# Altium PCB CP_PCB.PcbDoc
Units mil, origin at the board's own origin, x right, y up, seen from the top; angles counter-clockwise.
Board outline 1989.68 x 1920.98 mil, 2 copper layers (Top Layer, Bottom Layer); 47 components, 38 nets, 191 pads, 35 vias.
Unrouted connection lines stored in the file: 15.
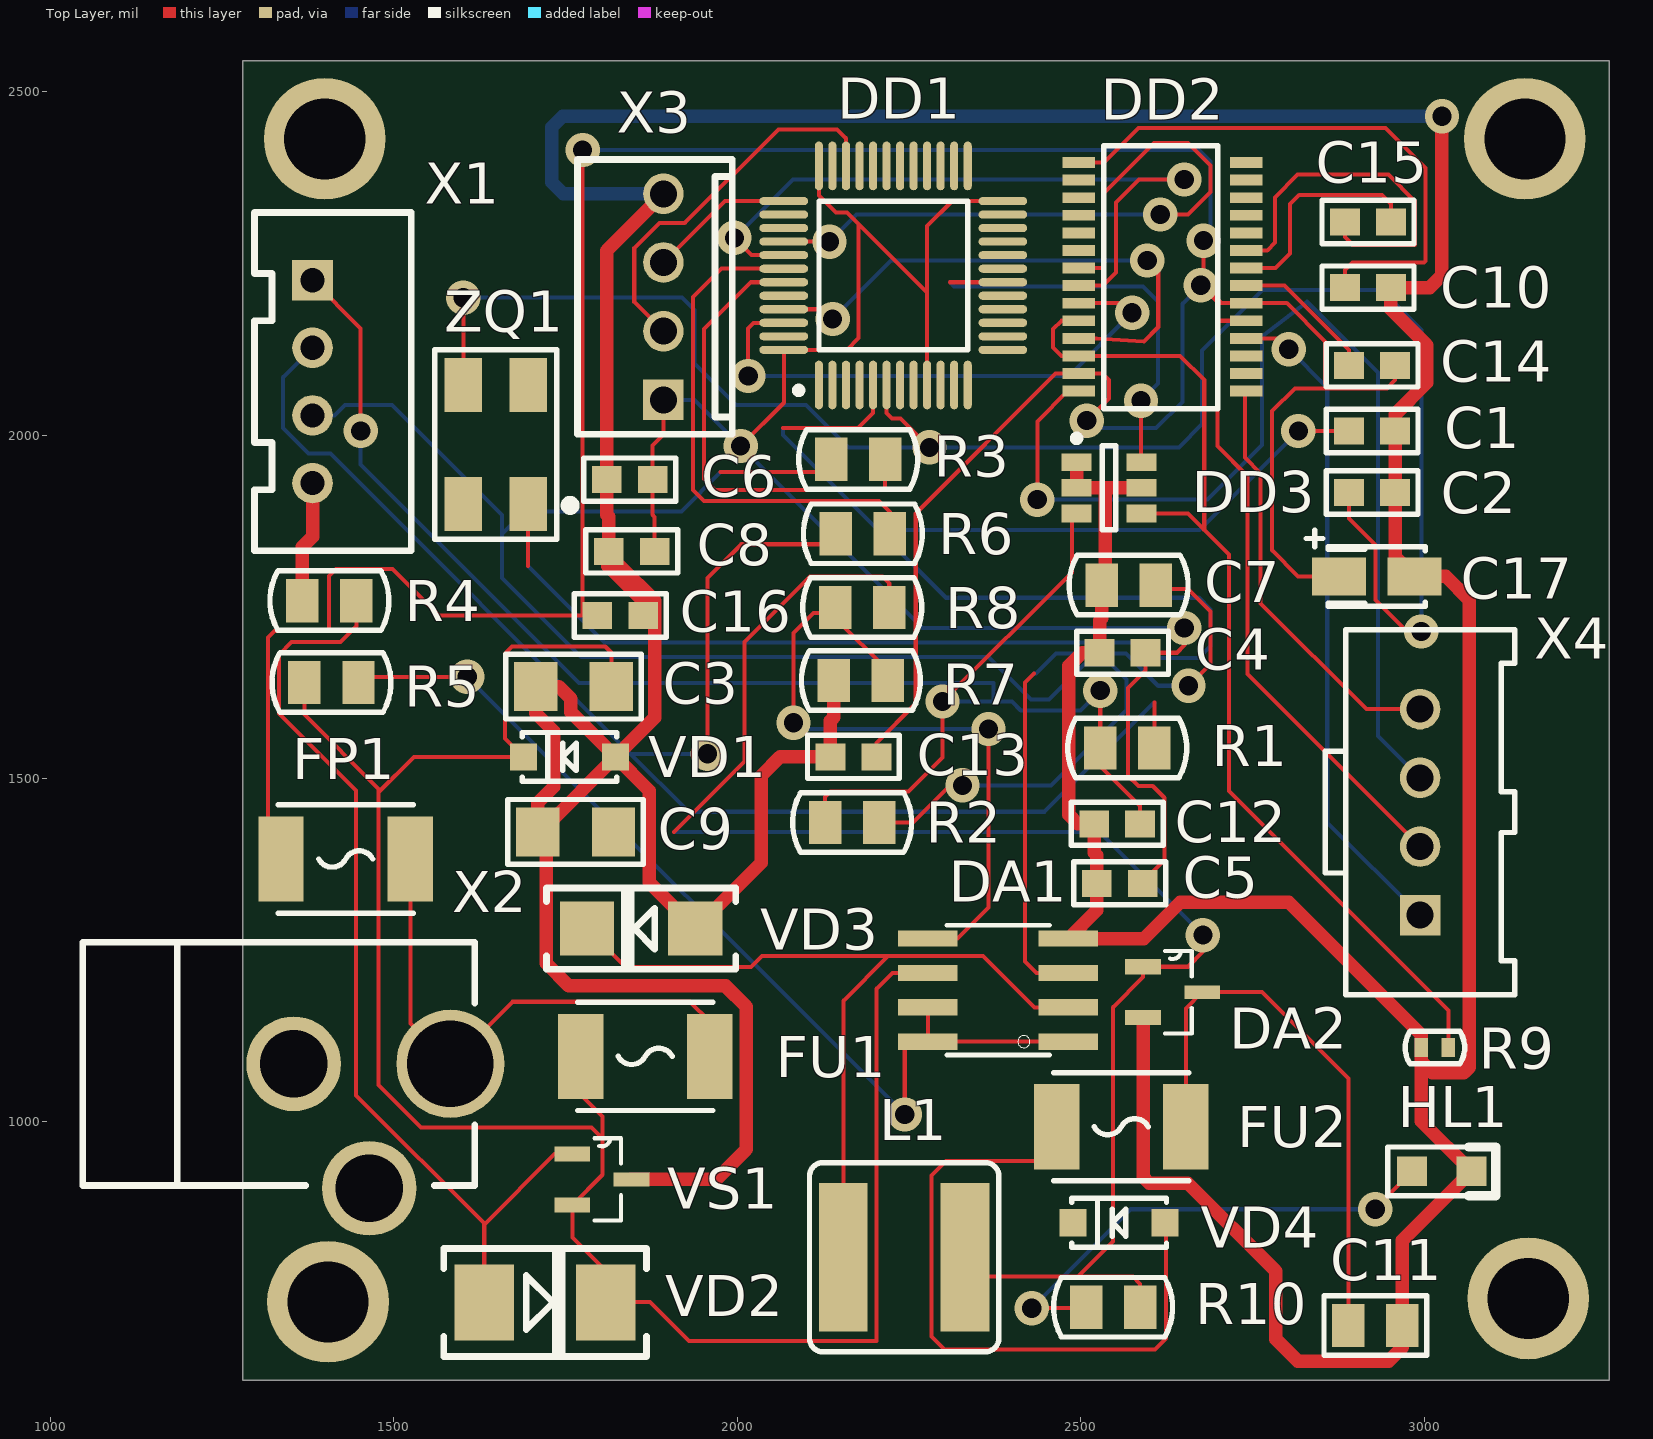
[diagram p0: Top Layer view]
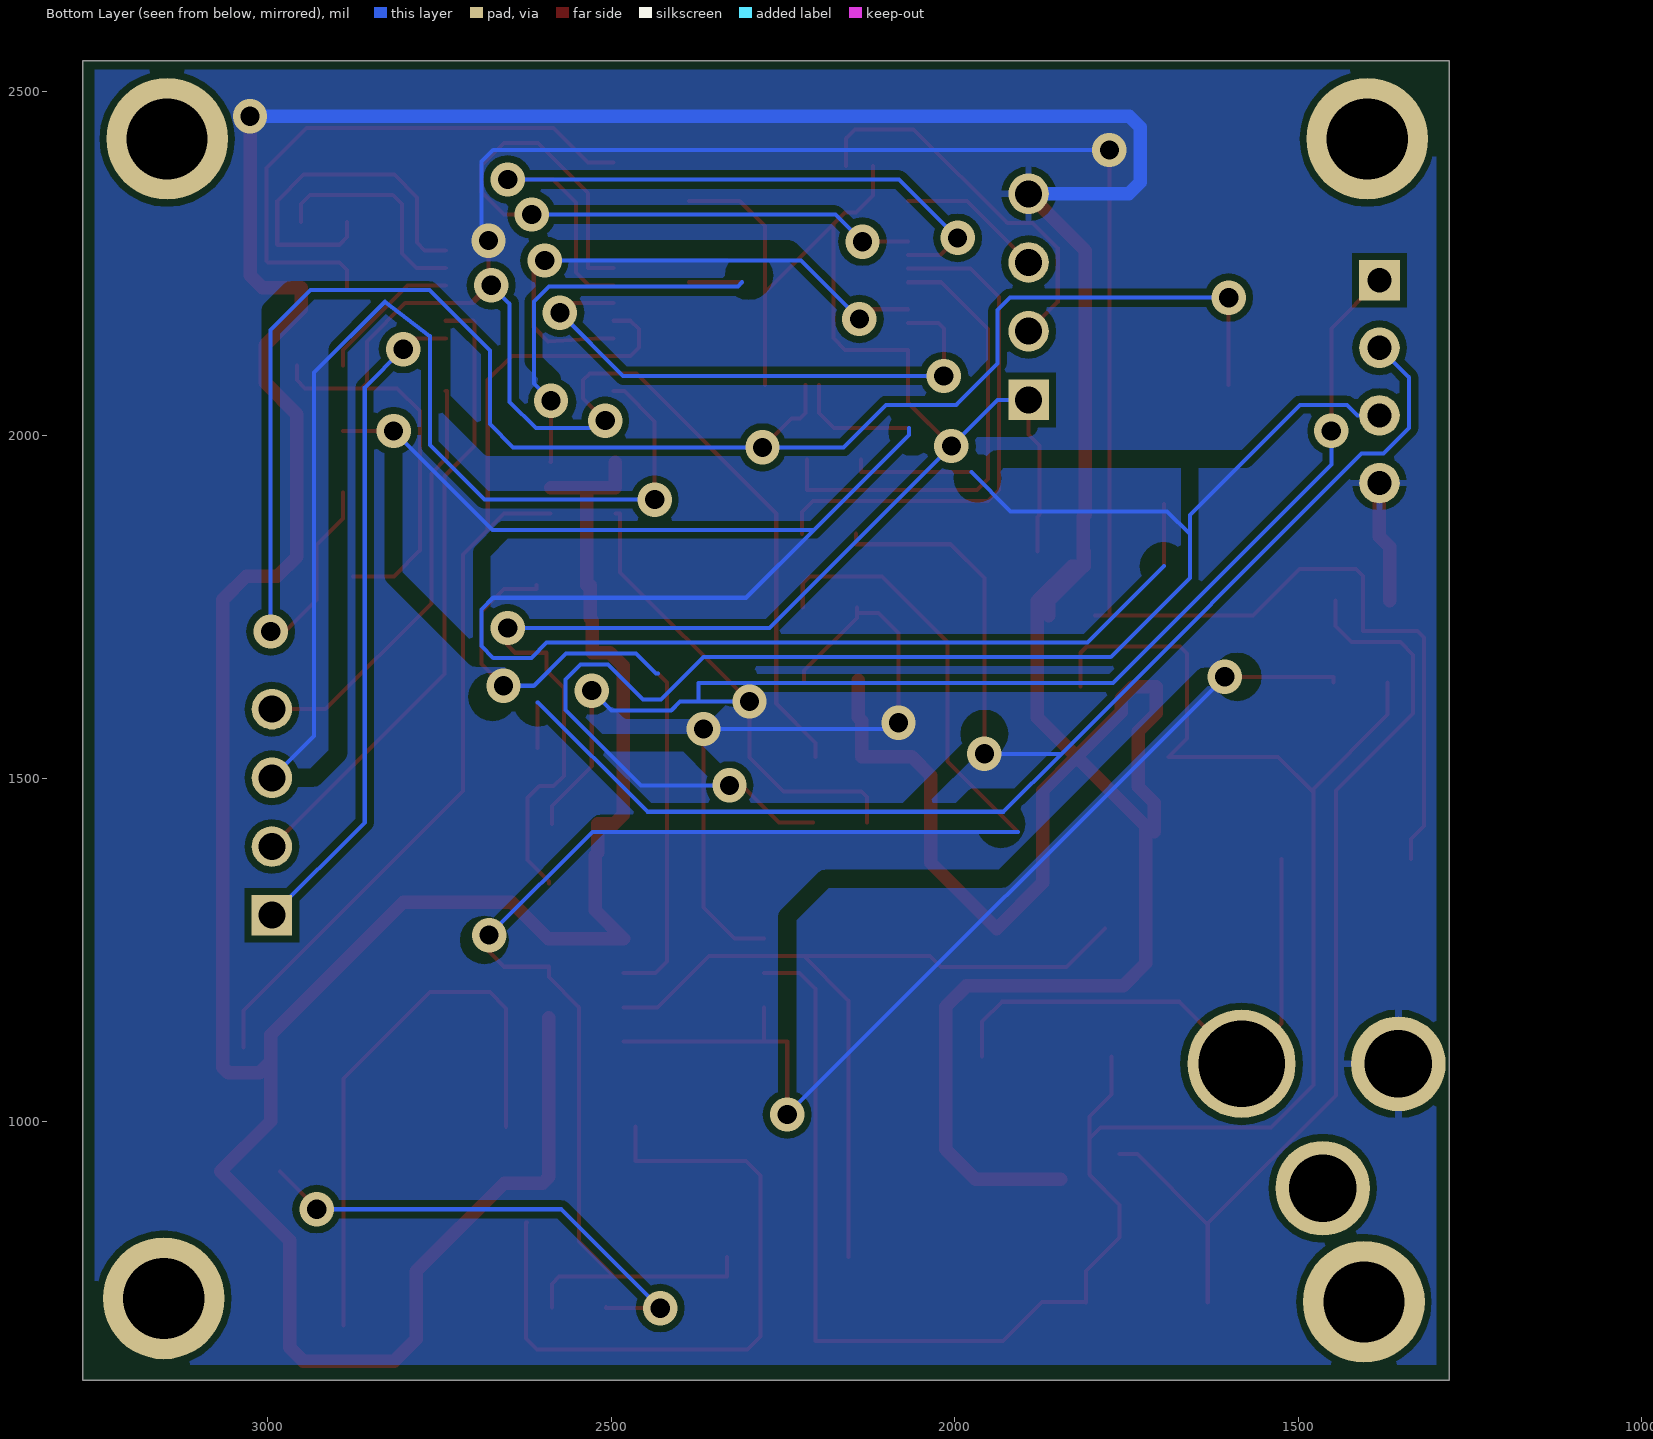
[diagram p1: Bottom Layer view, seen from below]
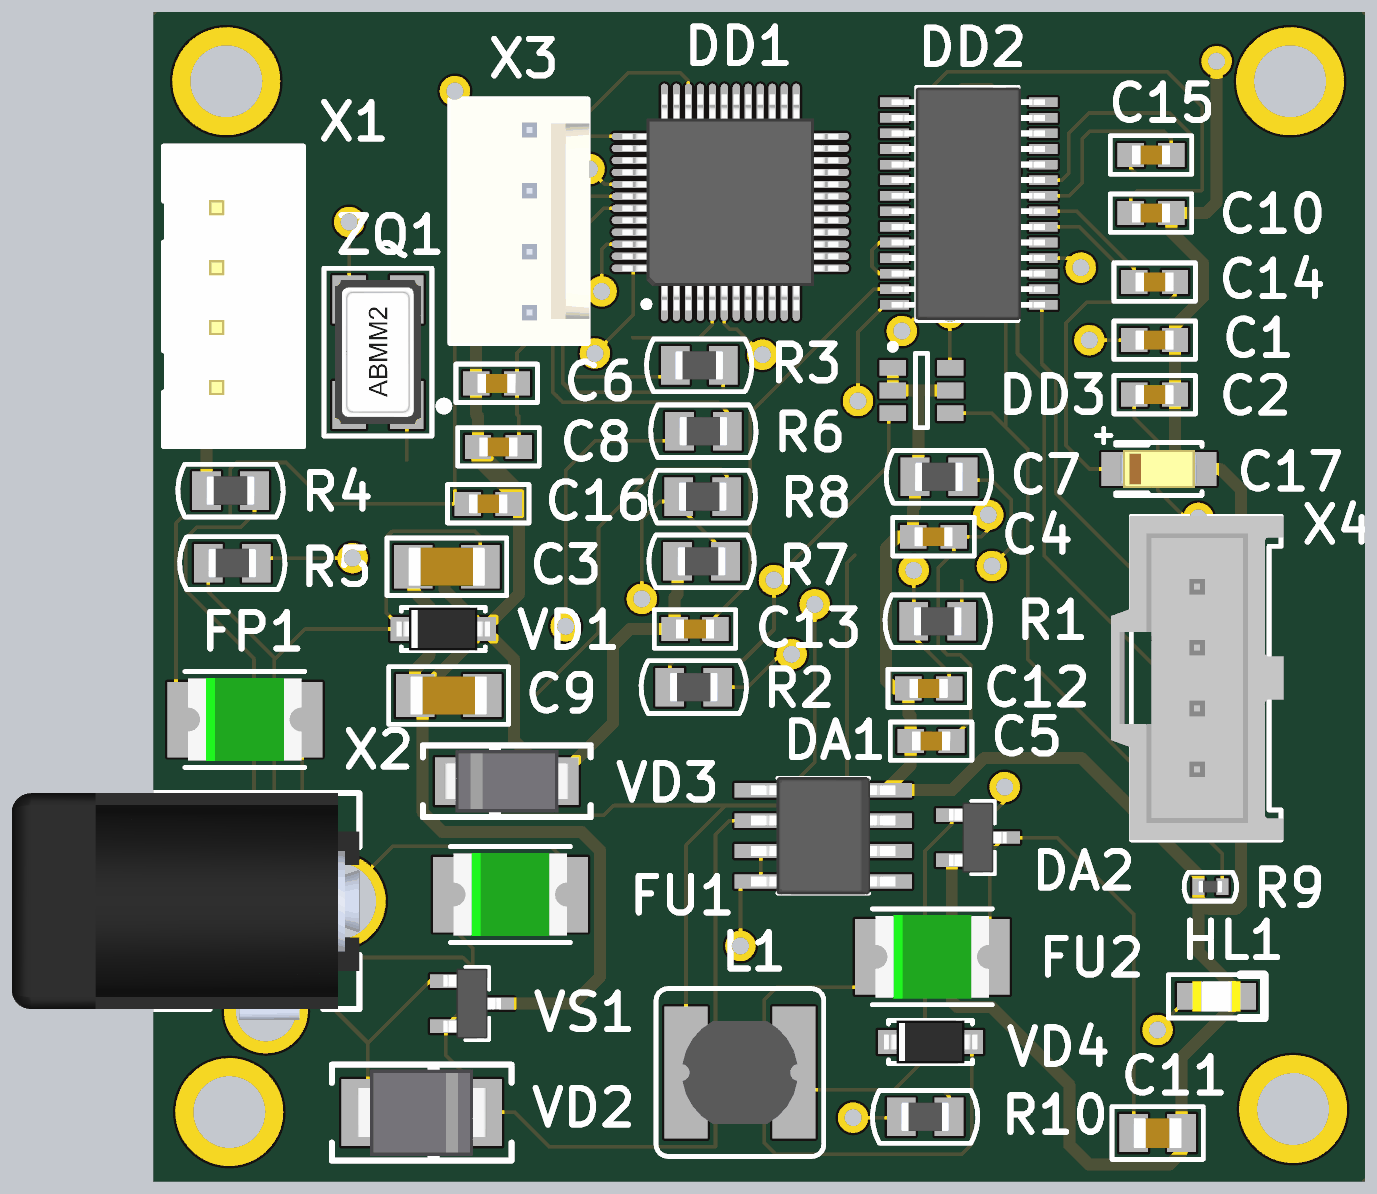
[diagram p2: 3D render of the assembled board from above, using the file's embedded part models]

## Layer stack, top to bottom
Top Solder: solder mask 0.4, Solder Resist, Dk 3.5
Top Layer: signal copper 1.4
Dielectric 1: dielectric 12.6, FR-4, Dk 4.8
Bottom Layer: signal copper 1.4
Bottom Solder: solder mask 0.4, Solder Resist, Dk 3.5

## Board outline
1280,624.02 3269.68,624.02 3269.68,2545 1280,2545

## Design rules (kind name [scope] priority, off if disabled: settings)
Clearance [All] p1: gap=10 ignorepadtopadclearanceinfootprint=FALSE except(0: Arc-Hole Track-Hole SMDPad-Hole THPad-Hole Via-Hole Fill-Hole Poly-Hole Region-Hole Text-Hole)
PolygonConnect [All] p1: connectstyle=Relief reliefconductorwidth=10 reliefentries=4 polygonreliefangle="90 Angle" airgapwidth=10
RoutingVias [All] p1: holewidth=28 width=50 viastyle="Through Hole" minholewidth=28 minwidth=50 maxholewidth=28 maxwidth=50
SolderMaskExpansion [All] p1: expansion=4
Width GND_0.5 [InNet('GND')] p1: maxlimit=19.68 minlimit=19.68 preferedwidth=19.68
Width Width_1 [All] p2: maxlimit=5.91 minlimit=5.91 preferedwidth=5.91
30 further rules are at their usual default settings.

## Components (designator, comment, footprint, x,y, rotation, side; value= is the part's Value field where it differs from the comment)
C1 "Capacitor" C0603 2924.21,2005.91 r0 top value=22
C2 "Capacitor" C0603 2924.21,1916.34 r0 top value=22
C3 "Capacitor-E" C1206 1761.81,1633.86 r180 top
C4 "Capacitor" C0603 2561.02,1683.07 r0 top value=0.1мк
C5 "Capacitor" C0603 2557.09,1347.44 r0 top value=0.1мк
C6 "Capacitor" C0603 1843.5,1935.04 r0 top value=0.1мк
C7 "Capacitor" R0805 2569.88,1781.5 r0 top
C8 "Capacitor" C0603 1846.46,1830.71 r0 top value=0.1мк
C9 "Capacitor-E" C1206 1764.76,1422.24 r180 top
C10 "Capacitor" C0603 2918.31,2214.57 r0 top value=0.1мк
C11 "Capacitor" C0805 2929.13,703.74 r0 top value=33мк
C12 "Capacitor" C0603 2553.15,1434.06 r0 top value=0.1мк
C13 "Capacitor" C0603 2169.29,1531.5 r0 top value=0.1мк
C14 "Capacitor" C0603 2924.21,2101.38 r0 top value=1п
C15 "Capacitor" C0603 2918.31,2310.04 r0 top value=47п
C16 "Capacitor" C0603 1829.72,1737.2 r0 top value=0.1мк
C17 "Capacitor-T" C3216-p 2931.1,1794.29 r0 top value=10мк
DA1 "MC34063A" PCBComponent_1 2379.92,1191.93 r90 top
DA2 "LM3940" SOT95P237X112-3N 2633.86,1188.98 r0 top
DD1 "STM32F103C8T6TR" LQFP-48 2227.36,2232.28 r90 top
DD2 "DRV8873S" 28_Pins 2125.98,2033.47 r0 top
DD3 "INA199" SOT23-6_N 2541.34,1923.23 r0 top
FP1 "Fuse_PTC" F1812 1430.12,1382.87 r180 top value=miniSMDC050F-2
FU1 "Fuse" F1812 1866.14,1095.47 r180 top value=1.3A
FU2 "Fuse" F1812 2559.06,993.11 r180 top value=100мA
HL1 "LED_3V" LD0805 3025.59,928.15 r0 top
L1 "Coil" МДГ-2 2243.11,803.15 r0 top value=40мкГн
R1 "Res_0.125" R0805 2567.91,1544.29 r0 top
R2 "Res_0.125" R0805 2167.32,1436.02 r0 top
R3 "Res_0.125" R0805 2176.18,1964.57 r0 top
R4 "Resistor_10,0W" R0805 1406.5,1758.86 r0 top
R5 "Resistor_1,0W" R0805 1409.45,1639.76 r0 top value=0.15
R6 "Res_0.125" R0805 2183.07,1856.3 r0 top
R7 "Resistor_0,25W" R0805 2180.12,1642.72 r0 top value=1к
R8 "Resistor_0,25W" R0805 2182.09,1749.02 r0 top value=3к
R9 "Resistor_0,05W" R0402 3015.75,1108.27 r0 top value=550
R10 "Resistor_0,05W" R0805 2547.24,730.32 r0 top
VD1 "Diode" SOD-123 1755.91,1531.5 r180 top
VD2 "Suppressor" DO-214AA 1720.47,737.2 r0 top
VD3 "Schottky" DO-214AC 1860.24,1281.5 r180 top
VD4 "Diode" SOD-123 2556.1,853.35 r180 top
VS1 "tiristor" SOT95P237X112-3N 1803.15,916.34 r0 top
X1 "I2C" CWF-4 1411.42,2077.76 r270 top
X2 "Vin" DJK-02-Series 1352.36,1045.28 r90 top
X3 "SWD" WF-4 1892.72,2201.18 r270 top
X4 "MOTOR" 90136-1x04 2994.09,1450.99 r90 top
ZQ1 "Crystal" "SMD 6x3.5mm" 1648.62,1986.22 r90 top value=РК463-8ВП-8000К

## Footprints (in the part's own frame and the unit in brackets; to place one, negate y for a bottom-side part, rotate by r counter-clockwise, add the part's x,y. Pads: shape width x height; smd on the part's side, far side on the other; paste and mask are expansions set on the pad)
28_Pins [mm]
  rect 1.2x0.4 smd: 1(9.425,9.225) 2(9.425,8.575) 3(9.425,7.925) 4(9.425,7.275) 5(9.425,6.625) 6(9.425,5.975) 7(9.425,5.325) 8(9.425,4.675) 9(9.425,4.025) 10(9.425,3.375) 11(9.425,2.725) 12(9.425,2.075) 13(9.425,1.425) 14(9.425,0.775) 15(15.625,0.775) 16(15.625,1.425) 17(15.625,2.075) 18(15.625,2.725) 19(15.625,3.375) 20(15.625,4.025) 21(15.625,4.675) 22(15.625,5.325) 23(15.625,5.975) 24(15.625,6.625) 25(15.625,7.275) 26(15.625,7.925) 27(15.625,8.575) 28(15.625,9.225)
  silkscreen extent 10.35,0.13 14.58,9.85, body extent 9.3,0.15 15.7,9.85, height 1.13
90136-1x04 [mm]
  rect 1.5x1.5 hole 1: 1(-3.81,0)
  round 1.5 hole 1: 2(-1.27,0) 3(1.27,0) 4(3.81,0)
  silkscreen extent -6.75,-3.5 6.75,3.5, body extent -6.75,-3.6 6.76,3.61, height 10.95
C0603 [mm] "1608M"
  rect 1.1x1 smd: 1(-0.85,0) 2(0.85,0)
  silkscreen extent -1.7,-0.8 1.7,0.8, body extent -0.8,-0.4 0.8,0.4, height 0.91
C0805 [mm] "2012M"
  rect 1.2x1.6 smd: 1(-1,0) 2(1,0)
  silkscreen extent -1.9,-1.1 1.9,1.1, body extent -1,-0.62 1,0.63, height 1.01
C1206 [mm] "3216M"
  rect 1.6x1.8 smd: 1(-1.4,0) 2(1.4,0)
  silkscreen extent -2.5,-1.2 2.5,1.2, body extent -1.6,-0.8 1.6,0.8, height 1.01
C3216-p [mm] "Type A"
  rect 2x1.4 smd: 1(-1.4,0) 2(1.4,0)
  silkscreen extent -2.6,-1.1 1.8,1.7, body extent -1.6,-0.8 1.6,0.8, height 1.8
CWF-4 [mm]
  rect 1.5x1.5 hole 0.9: 1(-3.75,-0.75)
  round 1.5 hole 0.9: 2(-1.25,-0.75) 3(1.25,-0.75) 4(3.75,-0.75)
  silkscreen extent -6.25,-2.9 6.25,2.9, body extent -6.2,-2.9 6.2,2.85, height 7.2
DJK-02-Series [mm]
  round 4 hole 3.2: 1(1,-5.85)
  round 3.5 hole 2.5: 2(1,-0.05) 3(-3.6,-2.85)
  silkscreen extent -3.5,-6.75 5.5,7.75, body extent -3.95,-6.75 5.5,7.75, height 11.5
DO-214AA [mm] "(SMB) Low profile package"
  rect 2.2x2.8 smd: 1(-2.25,0) 2(2.25,0)
  silkscreen extent -3.75,-2 3.75,2, body extent -2.7,-1.8 2.7,1.8, height 2.3
DO-214AC [mm] "(SMA) Low profile package"
  rect 2x2 smd: 1(-2,0) 2(2,0)
  silkscreen extent -3.5,-1.5 3.5,1.5, body extent -2.6,-1.3 2.6,1.3, height 2.4
F1812 [mm]
  rect 1.68x3.15 smd: 1(-2.39,0) 2(2.39,0)
  silkscreen extent -2.5,-2 2.5,2, body extent -2.36,-1.74 2.37,1.74, height 1.04
LD0805 [mm]
  rect 1.1x1.1 smd: 1(-1.1,0) 2(1.1,0)
  silkscreen extent -2,-0.9 2,0.9, body extent -1,-0.62 1,0.63, height 0.73
LQFP-48 [mm] "Thin QFP, 48-Leads, Body 7x7mm, Pitch 0.5mm, IPC Medium Density"
  oval 1.8x0.3 smd: 1(-4.05,2.75) 2(-4.05,2.25) 3(-4.05,1.75) 4(-4.05,1.25) 5(-4.05,0.75) 6(-4.05,0.25) 7(-4.05,-0.25) 8(-4.05,-0.75) 9(-4.05,-1.25) 10(-4.05,-1.75) 11(-4.05,-2.25) 12(-4.05,-2.75) 25(4.05,-2.75) 26(4.05,-2.25) 27(4.05,-1.75) 28(4.05,-1.25) 29(4.05,-0.75) 30(4.05,-0.25) 31(4.05,0.25) 32(4.05,0.75) 33(4.05,1.25) 34(4.05,1.75) 35(4.05,2.25) 36(4.05,2.75)
  oval 0.3x1.8 smd: 13(-2.75,-4.05) 14(-2.25,-4.05) 15(-1.75,-4.05) 16(-1.25,-4.05) 17(-0.75,-4.05) 18(-0.25,-4.05) 19(0.25,-4.05) 20(0.75,-4.05) 21(1.25,-4.05) 22(1.75,-4.05) 23(2.25,-4.05) 24(2.75,-4.05) 37(2.75,4.05) 38(2.25,4.05) 39(1.75,4.05) 40(1.25,4.05) 41(0.75,4.05) 42(0.25,4.05) 43(-0.25,4.05) 44(-0.75,4.05) 45(-1.25,4.05) 46(-1.75,4.05) 47(-2.25,4.05) 48(-2.75,4.05)
  silkscreen extent -4.37,-2.75 2.75,3.62, body extent -4.5,-4.5 4.5,4.5, height 1.5
PCBComponent_1 [mm]
  rect 0.6x2.2 smd: 1(-1.905,-2.6) 2(-0.635,-2.6) 3(0.635,-2.6) 4(1.905,-2.6) 5(1.905,2.6) 6(0.635,2.6) 7(-0.635,2.6) 8(-1.905,2.6)
  silkscreen extent -2.4,-1.9 2.4,1.9, body extent -2.45,-3.01 2.45,3.01, height 1.63
R0402 [mm] "1005M"
  rect 0.5x0.7 smd: 1(-0.5,0) 2(0.5,0)
  silkscreen extent -1.1,-0.6 1.1,0.6, body extent -0.5,-0.25 0.5,0.25, height 0.4
R0805 [mm] "2012M"
  rect 1.2x1.6 smd: 1(-1,0) 2(1,0)
  silkscreen extent -2.2,-1.1 2.2,1.1, body extent -1,-0.6 1,0.6, height 0.5
"SMD 6x3.5mm" [mm] "Crystal, SMD; 4 Leads; Body 3.5 x 6 x 1.2 mm (LxWxH)"
  rect 2x1.4 smd: 1(-2.2,-1.2) 2(2.2,-1.2) 3(2.2,1.2) 4(-2.2,1.2)
  silkscreen extent -3.5,-2.85 3.5,2.25, body extent -3,-1.8 3,1.8, height 1.22
SOD-123 [mm] "КД-36"
  rect 1x1 smd: 1(-1.7,0) 2(1.7,0)
  silkscreen extent -1.75,-0.9 1.75,0.9, body extent -1.95,-0.9 1.95,0.9, height 1.19
SOT23-6_N [mm] "SOT23, 6-Leads, Body 2.9x1.6mm, Pitch 0.95mm, Lead Span 2.7mm, IPC Medium Density"
  rect 1.1x0.65 smd: 1(-1.2,0.95) 2(-1.2,0) 3(-1.2,-0.95) 4(1.2,-0.95) 5(1.2,0) 6(1.2,0.95)
  silkscreen extent -1.32,-1.55 0.25,1.95, body extent -0.9,-1.55 0.9,1.55, height 1.45
SOT95P237X112-3N [mil]
  rect 52x22 smd: 1(-43,37) 2(-43,-37)
  rect 52x20 smd: 3(43,0)
  silkscreen extent -11,-60 28,60, body extent -47,-57 47,57, height 46
WF-4 [mm]
  rect 1.5x1.5 hole 1: 1(3.81,0)
  round 1.5 hole 1: 2(1.27,0) 3(-1.27,0) 4(-3.81,0)
  silkscreen extent -5.08,-3.18 5.08,2.54, body extent -5.08,-3.18 5.08,2.62, height 11.76
МДГ-2 [mm]
  rect 1.8x5.5 smd: 1(-2.25,0) 2(2.25,0)
  Top Layer pour cut-out: -1.35,2.75 1.35,2.75 1.35,-2.75 -1.35,-2.75
  silkscreen extent -3.5,-3.5 3.5,3.5, body extent -2.4,-2.15 2.4,2.15, height 3.5

## Part data
C1 C2 C4 C5 C6 C8 C10 C11 C12 C13 C14 C15 C16 C17: Voltage=50В, Type=Конденсатор
FP1: library part miniSMDC050F-2, Limit Voltage=24V, Rated Current=10А, Resistance=1ohm, ID=3, Part Number=miniSMDC050F-2, Published=25.0.2017, Type="Предохранитель самовосстанавливающийся"
HL1: library part Led-1, Published=03.12.2013, Publisher="Andrew Danich", Type="Индикатор единичный", Произв. номер=SMLE13EC8TT86, Прямое напряжение=3.3В, Прямой ток=3мА, Цвет=Синий
L1: library part КИВ18-100, DC Resistance=1.2ohm, Manufacturer="ОАО \"МСТАТОР\"", Rated Current=185mA, Tolerance=±10%, Working Temperature Max=+85°С, Working Temperature Min=-60°С, Application Category=5, ID=1, Part Number=КИВ18-100, Published=20.05.2010, Publisher="Andrew Danich", Q=20, Specification="КВШУ.670114.001 ТУ", Type=Дроссель
R1 R2 R3 R6: Case=0805, Manufacture="Panasonic Industrial Devices", HelpURL=https://ru.mouser.com/ProductDetail/Panasonic-Industrial-Devices/ERJ-6ENF2323V?qs=sGAEpiMZZMvdGkrng054tx7%2f6%252bNA3LAJkwXIsOwAlfs%3d, Model=ERJ-6ENF2323V
  R1 R2: Impedance=4,7К
  R3 R6: Impedance=100
VD3: "BYV10-40", Type=Диод, Максимальное обратное напряжение=40В, Прямой ток="1 А"
X1: library part I2C_2, Clock=SCL, Create=DeathSpeaker, Data=SDA, GND=GND, U=+5В
X4: library part OUTPUT_MOTOR
ZQ1: library part РК463-8ВП-8000К, Manufacturer="ОАО \"ПЬЕЗО\"", Output Frequency=8MHz, Working Temperature Max=+70°С, Working Temperature Min=-40°С, Application Category=5, Functional Analog=-, ID=6, Part Number=РК463-8ВП-8000К, Published=08.03.2013, Publisher="Andrew Danich", Specification="КЖБД.433514.020 ТУ", Type=Резонатор
C3: Published=20.08.2010, Publisher="Олег Литвинов", Type=Конденсатор, Ёмкость="100мк х 50В"
C7: Published=18.05.2010, Publisher="Andrew Danich", Type=Конденсатор, Ёмкость="400 х 50В"
C9: Published=20.08.2010, Publisher="Олег Литвинов", Type=Конденсатор, Ёмкость="10 х 50В"
DA2: Item ID=LM3940
FU1 FU2: Type="Вставка плавкая"
R4: Type=Резистор, Сопротивление=30
R5 R7 R8 R9: Type=Резистор
R10: Type=Резистор, Сопротивление=470
VD1 VD4: Type=Диод
VD2: Type=Супрессор, Напряжение=12В
X2: Create=DeathSpeaker, GND=GND, In=D+, Out=D-, U=+12В

## Free pads (board coordinates)
  round 177.17 hole 118.11: 2(1399.61,2431.1) 2(1404.53,738.19) 2(3146.65,2431.1) 2(3151.57,743.11)

## Via types
v1: diameter 50, hole 28, Top Layer to Bottom Layer, 35 vias

## Nets (pads, with @x,y where several pads share a name; then routed paths per layer and width w, separated by ;. In a path a pad name is that pad's centre, name@x,y a point inside that pad or via, vN(x,y) a via of type N, cw(c..) or ccw(c..) an arc to the next point about the centre after c; other vN are vias at no path point)
3.3В: VD4.2
5В: C9.1 DA2.1 L1.2 R8.2 R10.2 | length 2372.7
  Top Layer w5.91: 1908,1422.24 2010.86,1525.1 2010.86,1698.86 2106,1794 2211.46,1794 2221.46,1784 R8.2 ; L1.2 2331.69,775 2496,775 ; R10.2 2586.61,764.39 2576,775 2496,775 ; v1(2677.98,1272.02) 2677.98,1247.96 2656,1225.98 DA2.1 2590.86,1210.86 2547,1167 2547,826 2496,775
  Bottom Layer w5.91: 1908,1422.24 2527.76,1422.24 v1(2677.98,1272.02)
+3,3В: C4.2 C5.2 C6.2 C8.2 DD1.9 DD1.24 DD1.36 DD1.48 X3.1 | length 2667.2
  Top Layer w5.91: C8.2 1879.92,1881 1876.97,1883.95 C6.2 1876.97,1985 1892.72,2000.75 X3.1 ; v1(2005,1984) 2068,2047 DD1.48@2068,2124.01 ; DD1.48 DD1.48@2068,2124.01 ; DD1.36 2119.1,2348.71 2144,2323.81 2160,2323.81 2176.95,2306.86 ; DD1.9 2276.58,2207.23 ; DD1.24 2313.13,2340.55 2276.58,2304 2276.58,2207.23 ; C5.2 2590.55,1350.17 2622,1381.61 2622,1472 2605,1489 2584,1489 2569.05,1503.95 2569.05,1632 2594.49,1657.44 C4.2 2640,1683.07 2651,1694.07 v1(2651,1719) ; DD1.48@2068,2124.01 2160,2124.01 2176.95,2140.97 2176.95,2306.86 ; 2176.95,2306.86 2276.58,2207.23
  Bottom Layer w5.91: X3.1 1937.82,2051.18 v1(2005,1984) 2270,1719 v1(2651,1719)
+5В: C12.2 DD3.3 R1.1 R2.1 X1.1 | length 2513.9
  Top Layer w5.91: X1.1 1452,2155.28 v1(1452,2006) ; R2.1 2127.95,1472.95 2136,1481 2249.35,1481 2299,1530.65 v1(2299,1612) 2487.21,1800.21 2487.21,1885.83 DD3.3 ; v1(2528.54,1628) R1.1 2528.54,1518.07 2586.62,1460 C12.2
  Bottom Layer w5.91: v1(1452,2006) 1452,1957 1770,1639 2372.99,1639 2372.99,1612 ; v1(2299,1612) 2372.99,1612 ; v1(2528.54,1628) 2499.68,1599.14 2412.85,1599.14 2399.99,1612 2372.99,1612
GND: C1.2 C2.2 C3.2 C4.1 C5.1 C6.1 C7.1 C8.1 C9.2 C10.2 C11.2 C12.1 C13.1 C16.2 C17.2 DA1.4 DA2.2 DD1.8 DD1.23 DD1.35 DD1.47 DD2.16 DD2.17 DD2.24 DD3.1 DD3.2 DD3.5 HL1.2 R4.1 R7.1 R9.1 VD1.1 VD3.1 VS1.3 X1.4 X2.2 X3.4 | length 9448.6
  Top Layer w19.68: R4.1 1367.13,1837 1381.89,1851.76 X1.4 ; C9.2 1709.64,1464.64 1733,1488 1733,1568.69 1706.69,1595 C3.2 1740.14,1633.86 1758,1616 1758,1596.33 VD1.1 ; VS1.3 1969.49,916.34 2013.15,960 2013.15,1168 1983.15,1198 1755,1198 1722,1231 1722,1430.66 VD1.1 ; C16.2 1863.19,1758 1812.99,1808.2 1812.99,1809 ; X3.4 1810.04,2268.51 C6.1 1810.04,1883.95 1812.99,1881 C8.1 ; R7.1 2140.75,1588.92 2135.83,1584 C13.1 2062.5,1531.5 2035,1504 2035,1377.52 VD3.1 1872,1348.47 1872,1482.33 VD1.1 ; DD3.1 DD3.2 2536,1923.23 ; DD3.5 2536,1923.23 ; DA2.2 2591,1151.98 2591,920 2600,911 2656,911 2784,783 2784,684 2816,652 2948.5,652 2968.5,672 C11.2 2968.5,827.76 HL1.2 2996.06,1000.98 2996.06,1088 ; v1(3026,2464) 3026,2232.57 3008,2214.57 C10.2 2951.77,2183.23 3004,2131 3004,2076.32 2957.68,2030 C1.2 C2.2 2957.68,1822.84 C17.2 3031.71,1794.29 3066,1760 3066,1080 3058,1072 3012.06,1072 2996.06,1088 ; 1812.99,1809 1830,1809 1880,1759 1880,1588.66 VD1.1 ; 1812.99,1809 1812,1809 1812,1830.71 C8.1 ; 1812.99,1809 C8.1 ; 2536,1923.23 2536,1781.5 C7.1 2530.51,1732.95 2527.56,1730 C4.1 2502.07,1683.07 2483,1664 2483,1447.06 2496,1434.06 C12.1 2519.69,1391.94 2523.62,1388 C5.1 2523.62,1308.27 DA1.4 2591.98,1266.93 2645.05,1320 2803.06,1320 2996.06,1127 R9.1 2996.06,1088
  Bottom Layer w19.68: X3.4 1746.82,2351.18 1730,2368 1730,2448 1746,2464 v1(3026,2464)
NetC1_1: C1.1 DD1.5 ZQ1.1 | length 2862.7
  Top Layer w5.91: 1695.87,1809.13 ZQ1.1 ; 2067,2010 2176,2010 2197.84,2031.84 DD1.5 ; v1(2817,2005.91) C1.1
  Bottom Layer w5.91: 1695.87,1809.13 1807.23,1697.77 2594.32,1697.77 2616.42,1675.67 2672,1675.67 2688.95,1692.63 2688.95,1746.18 2672,1763.14 2303.86,1763.14 2205,1862 ; 2067,2010 2067,2000 2205,1862 ; v1(2817,2005.91) 2673.09,1862 2205,1862
NetC2_1: C2.1 DD1.6 ZQ1.3 | length 2660.6
  Top Layer w5.91: ZQ1.3 v1(1601.38,2200) ; DD1.6 2217.52,2032 2225.52,2024 2238,2024 v1(2280,1982) ; C2.1 2890.75,1878.25 2929,1840 2929,1760 2975,1714 v1(2996,1714)
  Bottom Layer w5.91: v1(1601.38,2200) 1920,2200 1938,2182 1938,2104 1998,2044 2100,2044 2162,1982 v1(2280,1982) 2643,1982 2677,2016 2677,2123 2765,2211 2938,2211 2996,2153 v1(2996,1714)
NetC3_1: C3.1 DA1.6 FU1.2 R5.1 VD1.2 VD2.2 VS1.2 | length 3019.4
  Top Layer w5.91: R5.1 1370.08,1592.92 1478,1485 1478,1480 ; FU1.2 1772.05,1039.95 1804,1008 1804,976 ; VD2.2 VD2.2@1809.05,738 ; C3.1 1816.93,1683.07 1808,1692 1672,1692 1662,1682 1662,1558.47 VD1.2 1529.5,1531.5 1478,1480 ; DA1.6 2226,1216.93 2203,1193.93 2203,681 1930,681 1873,738 VD2.2@1809.05,738 ; 1478,1480 1478,1053.68 1539.68,992 1788,992 1804,976 ; 1804,976 1804,923.19 VS1.2 1760.15,831.9 1809.05,783 VD2.2@1809.05,738
NetC7_2: C7.2 DA1.3 | length 971.3
  Top Layer w5.91: 2432,1653 2419,1640 2419,1233.93 2436,1216.93 DA1.3 ; C7.2 2609.25,1776 2656,1776 2689,1743 2689,1667 v1(2657,1635)
  Bottom Layer w5.91: 2432,1653 2435,1653 2463.86,1681.86 2566.14,1681.86 2613,1635 v1(2657,1635)
NetC10_1: C10.1 DD2.1 | length 834
  Top Layer w5.91: DD2.1 2534,2396.66 2584.34,2447 2944,2447 3002.28,2388.72 3002.28,2253.42 2999.87,2251 2895.84,2251 2884.84,2240 C10.1
NetC11_1: C11.1 DA2.3 FU2.1 | length 830.2
  Top Layer w5.91: FU2.1 2653.15,1165.27 DA2.3 2764.02,1188.98 2889.76,1063.24 C11.1
NetC13_2: C13.2 C14.2 C16.1 C17.1 DD2.13 DD2.20 FP1.2 | length 4727
  Top Layer w5.91: FP1.2 1336.02,1412 1317,1431.02 1317,1705 1326.41,1714.41 1406,1714.41 1406,1795 1416,1805 1498,1805 1565.79,1737.21 C16.1@1775,1737.21 ; v1(1775,2415) C16.1@1775,1737.21 ; C16.1 C16.1@1775,1737.21 ; C13.2 2202.76,1552 2260,1609.24 2260,1886 2463.57,2089.57 DD2.13 2531.46,2089.57 2541.03,2080 2541.03,2053.03 v1(2509,2021) ; v1(2674.93,2218) 2701,2191.93 2705,2191.93 ; v1(2678.93,2283) 2678.93,2218 2705,2191.93 ; C17.1 2816.68,1794.29 2778.68,1832.29 2778.68,2034.68 2812,2068 2864,2068 ; C14.2 2957.68,2080 2945.68,2068 2864,2068 ; 2705,2191.93 DD2.20 2800.1,2191.93 2856,2136.03 2856,2076 2864,2068
  Bottom Layer w5.91: v1(1775,2415) 2672,2415 2689,2398 2689,2293.07 v1(2678.93,2283) ; v1(2509,2021) 2520,2010 2610,2010 2648,2048 2648,2191.07 v1(2674.93,2218)
NetC14_1: C14.1 DD2.21 | length 210.8
  Top Layer w5.91: DD2.21 2797,2217.52 2890.75,2123.77 C14.1
NetC15_1: C15.1 DD2.23 | length 537.1
  Top Layer w5.91: DD2.23 2771.7,2268.7 2783,2280 2783,2346 2816,2379 2948,2379 2986.38,2340.62 2986.38,2277 2896,2277 2884.84,2288.16 C15.1
NetC15_2: C15.2 DD2.22 | length 328.1
  Top Layer w5.91: DD2.22 2784,2243.11 2805,2264.11 2805,2336 2818.25,2349.25 2938.52,2349.25 2951.77,2336 C15.2
NetDA1_1: DA1.1 DA1.7 DA1.8 R5.2 | length 1461.5
  Top Layer w5.91: R5.2 1448.82,1648 v1(1607,1648) ; v1(2244,1011) 2244,1116.93 DA1.8 ; DA1.7 DA1.8 ; DA1.1 DA1.8
  Bottom Layer w5.91: v1(1607,1648) v1(2244,1011)
NetDA1_2: DA1.2 L1.1 VD3.2 | length 1227.1
  Top Layer w5.91: VD3.2 1837.35,1225.65 2019.9,1225.65 2035.95,1241.69 2219.75,1241.69 ; L1.1 2154.53,1176.47 2219.75,1241.69 ; DA1.2 2432.76,1166.93 2358,1241.69 2219.75,1241.69
NetDA1_5: DA1.5 R7.2 R8.1 | length 996.7
  Top Layer w5.91: v1(2082,1581) 2082,1712 2111,1741 R8.1@2142.72,1741 ; R8.1 R8.1@2142.72,1741 ; R7.2 2219.49,1657 2142.72,1733.77 R8.1@2142.72,1741 ; DA1.5 2320.93,1266.93 2366,1312 v1(2366,1572)
  Bottom Layer w5.91: v1(2082,1581) 2091,1572 v1(2366,1572)
NetDD1_18: DD1.18 DD3.6 | length 636.7
  Top Layer w5.91: 2309.56,2222.44 DD1.18 ; v1(2588,2050.05) 2588,1960.63 DD3.6
  Bottom Layer w5.91: 2309.56,2222.44 2315.95,2216.05 2591,2216.05 2612.88,2194.16 2612.88,2074.93 v1(2588,2050.05)
NetDD1_34: DD1.34 X3.2 | length 564.1
  Top Layer w5.91: X3.2 1850.23,2193.66 1850.23,2272.23 1886.7,2308.7 1923.7,2308.7 2060,2445 2145.47,2445 2158.47,2432 DD1.34
NetDD1_37: DD1.37 X3.3 | length 212.2
  Top Layer w5.91: X3.3 1982.08,2340.55 DD1.37
NetDD1_40: DD1.40 DD2.7 | length 1033.8
  Top Layer w5.91: DD1.40 v1(2134.5,2281.5) ; DD2.7 2534,2243.11 2534,2352 2607,2425 2656,2425 2688.95,2392.05 2688.95,2353.95 2656,2321 v1(2616,2321)
  Bottom Layer w5.91: v1(2134.5,2281.5) 2174,2321 v1(2616,2321)
NetDD1_41: DD1.41 DD2.8 | length 1050.2
  Top Layer w5.91: v1(1996,2287) 2021.19,2261.81 DD1.41 ; DD2.8 2532.52,2217.52 2551.33,2236.33 2551.33,2338.3 2585.03,2372 v1(2651,2372)
  Bottom Layer w5.91: v1(1996,2287) 2081,2372 v1(2651,2372)
NetDD1_42: DD1.42 R6.2 | length 761.2
  Top Layer w5.91: DD1.42 1977.13,2242.13 1936,2201 1936,1920.21 1952,1904.21 2206.23,1904.21 2222.44,1888 R6.2
NetDD1_43: DD1.43 R3.2 | length 677
  Top Layer w5.91: DD1.43 2020,2222.44 1952,2154.44 1952,1936.12 1968,1920.12 2215.55,1920.12 R3.2
NetDD1_45: DD1.45 DD2.11 | length 798.6
  Top Layer w5.91: DD1.45 2124.93,2183.07 v1(2139,2169) ; DD2.11 2523,2140.75 2592,2136 2613,2157 2613,2238 v1(2597,2254)
  Bottom Layer w5.91: v1(2139,2169) 2224,2254 v1(2597,2254)
NetDD1_46: DD1.46 DD2.9 | length 805.3
  Top Layer w5.91: v1(2016,2086) 2016,2155.39 2024,2163.39 DD1.46 ; DD2.9 2561,2191.93 v1(2574.93,2178)
  Bottom Layer w5.91: v1(2016,2086) 2482.93,2086 v1(2574.93,2178)
NetDD2_10: DD2.10 DD2.12 DD3.4 R9.2 | length 1529
  Top Layer w5.91: DD2.10 2472,2166.34 2460,2154.34 2460,2127.16 2472,2115.16 DD2.12 2644.84,2115.16 2680,2080 2680,1861.83 ; DD3.4 2656,1885.83 2680,1861.83 ; R9.2 3035.43,1162.57 2716,1482 2716,1825.83 2680,1861.83
NetDD2_14: DD2.14 X4.3 | length 1554.6
  Top Layer w5.91: v1(2437,1906) 2437,2019.98 2481,2063.98 DD2.14
  Bottom Layer w5.91: v1(2437,1906) 2685,1906 2764.29,1985.29 2764.29,2144 2829.82,2194.02 2933.02,2090.82 2933.02,1562.06 X4.3
NetDD2_15: DD2.15 X4.4 | length 616.5
  Top Layer w5.91: DD2.15 2739,2063.98 2739,1967 2762,1944 2762,1755 2916.02,1600.98 X4.4
NetDD2_18: DD2.18 X4.1 | length 971.6
  Top Layer w5.91: DD2.18 2787.25,2140.75 v1(2803,2125)
  Bottom Layer w5.91: v1(2803,2125) 2859,2069 2859,1436.08 X4.1
NetDD2_19: DD2.19 X4.2 | length 928.5
  Top Layer w5.91: DD2.19 2701.07,2166.34 2699,2164.27 2699,1984 2743,1940 2743,1652.08 X4.2
NetFP1_1: FP1.1 FU1.1 X2.1 | length 800.2
  Top Layer w5.91: FP1.1 1524.21,1143.11 X2.1 1673.03,1175 1931.64,1175 1960.24,1146.41 FU1.1
NetFU2_2: FU2.2 VD4.1 | length 999.6
  Top Layer w5.91: FU2.2 2464.96,943 2304,943 2283,922 2283,688 2302,669 2608,669 2624,685 2624,853.35 VD4.1
NetHL1_1: HL1.1 R10.1 | length 717.1
  Top Layer w5.91: v1(2429,729) 2507.87,729 R10.1 ; v1(2929,873) 2929,874.87 HL1.1
  Bottom Layer w5.91: v1(2429,729) 2573,873 v1(2929,873)
NetR1_2: R1.2 R6.1 X1.2 | length 2356.9
  Top Layer w5.91: v1(1957,1536) 1957,1792 2006,1841 2143.7,1841 R6.1 ; R1.2 2607.28,1610.72
  Bottom Layer w5.91: X1.2 1339,2084.08 1339,2010 1376,1973 1408,1973 1845,1536 ; v1(1957,1536) 1845,1536 ; 2607.28,1610.72 2606.72,1610.72 2447.62,1451.62 1929.38,1451.62 1845,1536
NetR2_2: R2.2 R3.1 X1.3 | length 2460
  Top Layer w5.91: 1975.97,1945.97 2136.81,1945.97 R3.1 ; R2.2 2256,1436 2310,1490 v1(2328,1490)
  Bottom Layer w5.91: X1.3 1414.05,2028.54 1429.46,2043.95 1497.68,2043.95 1658,1883.64 1658,1856 ; 1975.97,1945.97 1919,1889 1691,1889 1658,1856 ; v1(2328,1490) 2457,1490 2567,1600 2567,1644 2545.05,1665.95 2504.95,1665.95 2454.05,1615.05 2428.02,1615.05 2366.11,1676.95 1773.05,1676.95 1658,1792 1658,1856
NetR4_2: R4.2 VD2.1 VS1.1 | length 1404.4
  Top Layer w5.91: R4.2 1445.87,1721.87 1422.5,1698.5 1351.5,1698.5 1333,1680 1333,1594.41 1445,1482.41 1445,1038.87 1631.89,851.98 1631.89,851 ; VD2.1 1631.89,851 ; VS1.1 1734.23,953.34 1631.89,851
pads on no net: DD1.1 DD1.2 DD1.3 DD1.4 DD1.7 DD1.10 DD1.11 DD1.12 DD1.13 DD1.14 DD1.15 DD1.16 DD1.17 DD1.19 DD1.20 DD1.21 DD1.22 DD1.25 DD1.26 DD1.27 DD1.28 DD1.29 DD1.30 DD1.31 DD1.32 DD1.33 DD1.38 DD1.39 DD1.44 DD2.2 DD2.3 DD2.4 DD2.5 DD2.6 DD2.25 DD2.26 DD2.27 DD2.28 X2.3 ZQ1.2 ZQ1.4

## Polygon pours and split planes (outlines as drawn)
GND on Bottom Layer "Bottom Layer-GND" (solid, pour order 14): 1299.21,2528.54 1302.17,2531.5 3251.97,2531.5 3251.97,641.73 3247.05,646.65 1299.21,646.65

## Silkscreen, mask and mechanical layers (free items; w line width, h text height)
Mechanical 19:
  the board outline again, w10

## Dimensions
1280,2545 to 3269.68,2545 on Top Layer
3269.68,2545 to 3269.68,624.02 on Top Layer

## Text inside footprints (layer, text, board x,y; h text height)
L1: Mechanical 13 "Check!" at 2101.38,787.4 h60